# Altium PCB 740959.PCBDOC
Units mil, origin at the board's own origin, x right, y up, seen from the top; angles counter-clockwise.
Board outline 3090.55 x 1732.28 mil, 2 copper layers (Top Layer, Bottom Layer); 112 components, 0 nets, 222 pads, 75 vias.
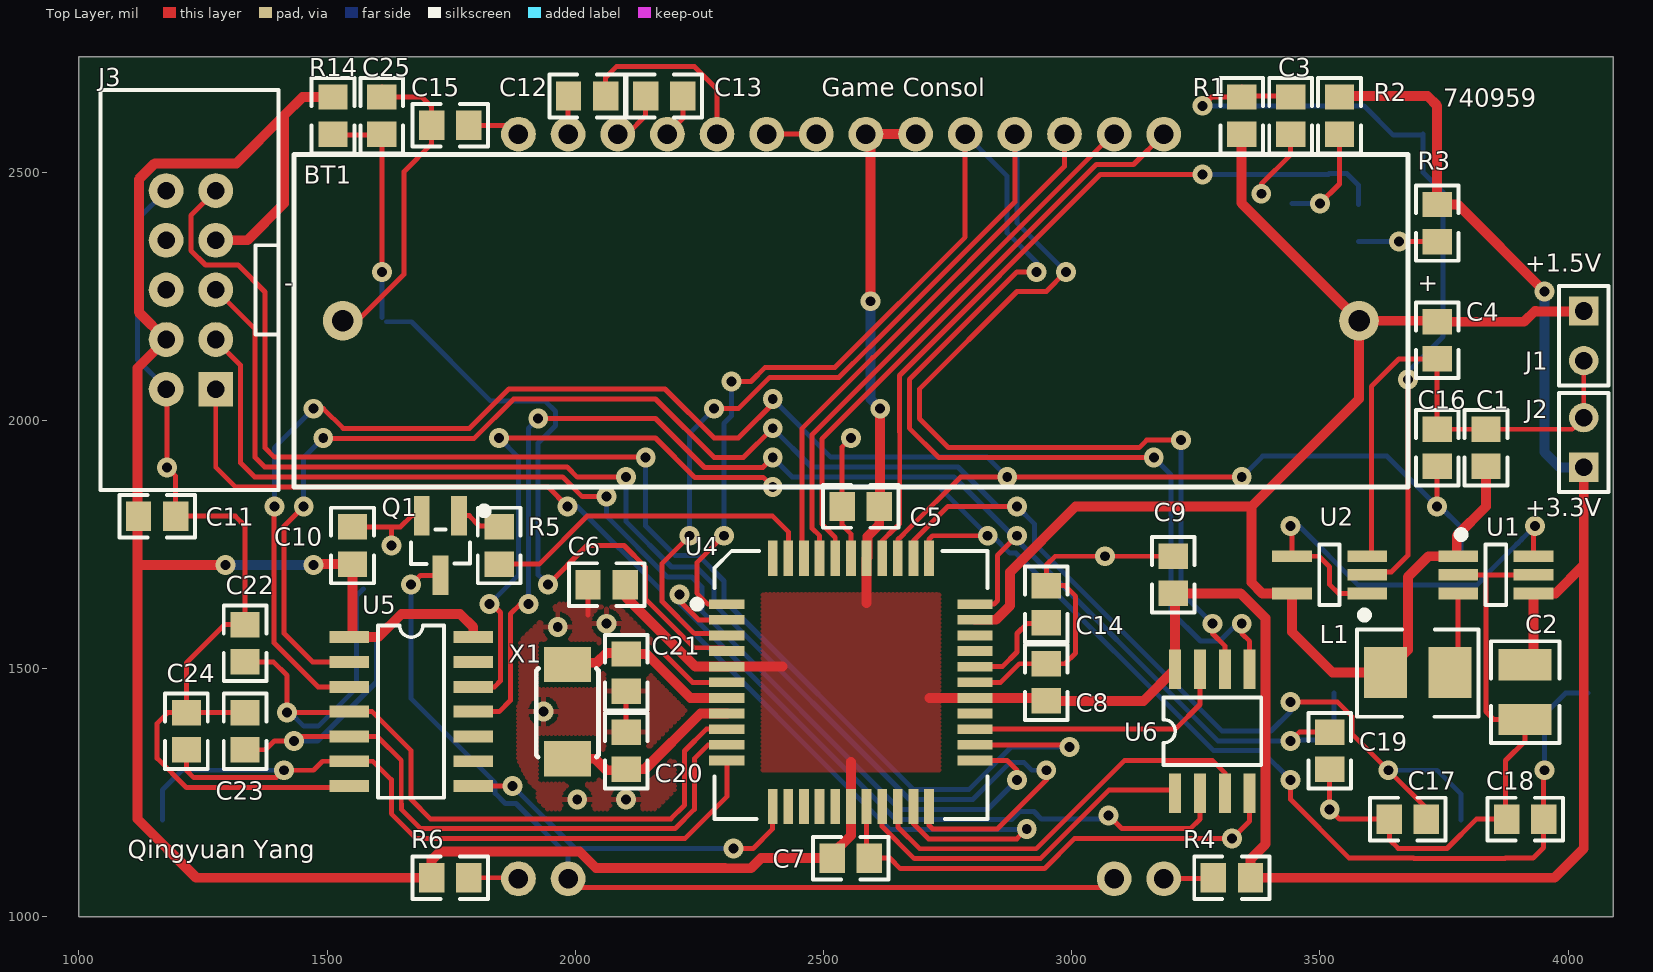
[diagram p0: Top Layer view]
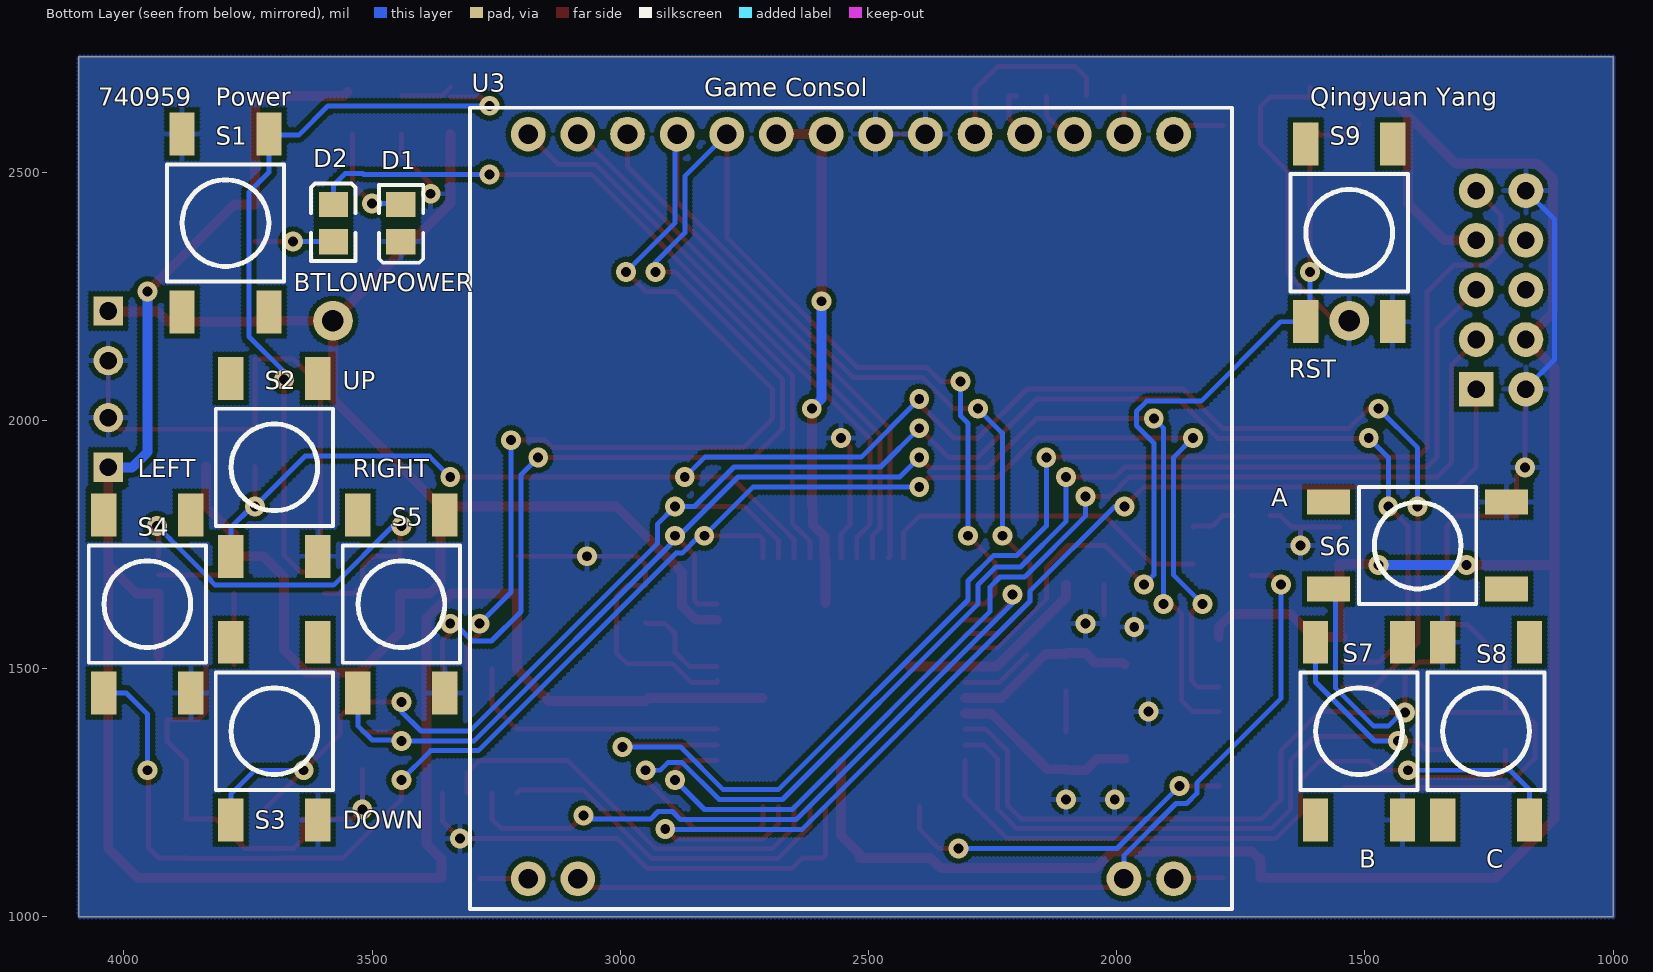
[diagram p1: Bottom Layer view, seen from below]

## Layer stack, top to bottom
Top Layer: signal copper 1.4
Dielectric: dielectric 12.6, FR-4, Dk 4.8
Bottom Layer: signal copper 1.4

## Board outline
1000,1000 4090.55,1000 4090.55,2732.28 1000,2732.28

## Components (designator, comment, footprint, x,y, rotation, side; value= is the part's Value field where it differs from the comment)
BT1 "1.5v" BATT_HOLDER 2555.12,2200.79 r0 top
C1 "1uF" 0805 3834.65,1944.88 r90 top
C2 "22uF" 1210 3913.39,1452.76 r270 top
C3 "100nF" 0805 3440.94,2614.17 r270 top
C4 "100nF" 0805 3736.22,2161.42 r270 top
C5 "100nF" 0805 2574.8,1826.77 r180 top
C6 "100nF" 0805 2062.99,1669.29 r180 top
C7 "100nF" 0805 2555.12,1118.11 r0 top
C8 "100nF" 0805 2948.82,1472.44 r90 top
C9 "100nF" 0805 3204.72,1688.98 r90 top
C10 "100nF" 0805 1551.18,1748.03 r90 top
C11 "100nF" 0805 1157.48,1807.09 r0 top
C12 "1uF" 0805 2023.62,2653.54 r0 top
C13 "1uF" 0805 2179.13,2653.54 r0 top
C14 "100nF" 0805 2948.82,1629.92 r270 top
C15 "1uF" 0805 1748.03,2594.49 r180 top
C16 "100nF" 0805 3736.22,1944.88 r90 top
C17 "100nF" 0805 3677.17,1196.85 r180 top
C18 "100nF" 0805 3913.39,1196.85 r180 top
C19 "100nF" 0805 3519.68,1334.65 r270 top
C20 "18pF" 0805 2102.36,1334.65 r90 top
C21 "18pF" 0805 2102.36,1492.13 r270 top
C22 "100nF" 0805 1334.65,1551.18 r90 top
C23 "100nF" 0805 1334.65,1374.02 r90 top
C24 "100nF" 0805 1216.54,1374.02 r90 top
C25 "100nF" 0805 1610.24,2614.17 r90 top
D1 "POWER" 0805D 3441.94,2397.64 r90 bottom
D2 "BTLOW" 0805D 3577.74,2397.64 r270 bottom
J1 "+1.5V" HDR1X2 4031.5,2220.47 r270 top
J2 "+3.3V" HDR1X2 4031.5,1905.51 r90 top
J3 "JTAG" BOXEDVERT10 1275.59,2062.99 r90 top
L1 "4.7uH" 1210L 3696.85,1492.13 r180 top
Q1 "RTR025N03TL" SOT23 1728.35,1748.03 r270 top
R1 "10k" 0805 3342.52,2614.17 r90 top
R2 "220" 0805 3539.37,2614.17 r270 top
R3 "220" 0805 3736.22,2397.64 r90 top
R4 "1k" 0805 3322.83,1078.74 r180 top
R5 "15" 0805 1846.46,1748.03 r90 top
R6 "1k" 0805 1748.03,1078.74 r0 top
R14 "10k" 0805 1511.81,2614.17 r270 top
S1 "Power" SPNO_SMD 3795.28,2397.64 r270 bottom
S2 "UP" SPNO_SMD 3696.85,1905.51 r90 bottom
S3 "DOWN" SPNO_SMD 3696.85,1374.02 r90 bottom
S4 "LEFT" SPNO_SMD 3952.76,1629.92 r90 bottom
S5 "RIGHT" SPNO_SMD 3440.94,1629.92 r90 bottom
S6 "A" SPNO_SMD 1393.7,1748.03 r0 bottom
S7 "B" SPNO_SMD 1511.81,1374.02 r90 bottom
S8 "C" SPNO_SMD 1255.91,1374.02 r270 bottom
S9 "RST" SPNO_SMD 1531.5,2377.95 r90 bottom
U1 "SC120" SOT23-6 3854.33,1688.98 r0 top
U2 "74AUG1G80" SOT23-5 3519.68,1688.98 r180 top
U3 "EA DOGS102x-6_LCD" "EA DOGS102x" 2535.43,1826.77 r180 bottom
U4 "ATMEGA16" QFP-48 2555.12,1472.44 r0 top
U5 "74AHC30_NAND" SOIC-14 1669.29,1413.39 r0 top
U6 "FM25L04B_RAM" SOIC-8 3283.46,1374.02 r90 top
X1 "7.68Mhz" XTAL_FLAT_SMD 1984.25,1413.39 r90 top
? "" ? 0,0 r0 top
? "" ? 0,0 r0 top
? "" ? 0,0 r0 top
? "" ? 0,0 r0 top
? "" ? 0,0 r0 top
? "" ? 0,0 r0 top
? "" ? 0,0 r0 top
? "" ? 0,0 r0 top
? "" ? 0,0 r0 top
? "" ? 0,0 r0 top
? "" ? 0,0 r0 top
? "" ? 0,0 r0 top
? "" ? 0,0 r0 top
? "" ? 0,0 r0 top
? "" ? 0,0 r0 top
? "" ? 0,0 r0 top
? "" ? 0,0 r0 top
? "" ? 0,0 r0 top
? "" ? 0,0 r0 top
? "" ? 0,0 r0 top
? "" ? 0,0 r0 top
? "" ? 0,0 r0 top
? "" ? 0,0 r0 top
? "" ? 0,0 r0 top
? "" ? 0,0 r0 top
? "" ? 0,0 r0 top
? "" ? 0,0 r0 top
? "" ? 0,0 r0 top
? "" ? 0,0 r0 top
? "" ? 0,0 r0 top
? "" ? 0,0 r0 top
? "" ? 0,0 r0 top
? "" ? 0,0 r0 top
? "" ? 0,0 r0 top
? "" ? 0,0 r0 top
? "" ? 0,0 r0 top
? "" ? 0,0 r0 top
? "" ? 0,0 r0 top
? "" ? 0,0 r0 top
? "" ? 0,0 r0 top
? "" ? 0,0 r0 top
? "" ? 0,0 r0 top
? "" ? 0,0 r0 top
? "" ? 0,0 r0 top
? "" ? 0,0 r0 top
? "" ? 0,0 r0 top
? "" ? 0,0 r0 top
? "" ? 0,0 r0 top
? "" ? 0,0 r0 top
? "" ? 0,0 r0 top
? "" ? 0,0 r0 top
? "" ? 0,0 r0 top
? "" ? 0,0 r0 top
? "" ? 0,0 r0 top
? "" ? 0,0 r0 top
? "" ? 0,0 r0 top

## Footprints (in the part's own frame and the unit in brackets; to place one, negate y for a bottom-side part, rotate by r counter-clockwise, add the part's x,y. Pads: shape width x height; smd on the part's side, far side on the other; paste and mask are expansions set on the pad)
0805 [mm] "0805 Footprint"
  rect 1.3x1.5 smd: 1(-0.95,0) 2(0.95,0)
  silkscreen extent -1.93,-1.09 1.93,1.09
0805D [mm] "0805 Diode"
  rect 1.3x1.5 smd: A(0.95,0) K(-0.95,0)
  silkscreen extent -2.03,-1.14 1.95,1.12
1210 [mm]
  rect 1.6x2.7 smd: 1(-1.4,0) 2(1.4,0)
  silkscreen extent -2.6,-1.75 2.6,1.75
1210L [mm] "Precision Wire Wound Inductor, 2-Leads, Body 3.2x3.2mm, IPC Low Density"
  rect 2.2x2.6 smd: 1(-1.651,0) 2(1.651,0)
  silkscreen extent -3.12,-2.21 3.1,2.26
BATT_HOLDER [mil]
  round 80 hole 43.31: 1(1023.62,0) 2(-1023.62,0)
  silkscreen extent -1122,-335 1122,335
BOXEDVERT10 [mil] "IDC Header 2.54mm Boxed 10 pins"
  rect 70x70 hole 35.43: 1(0,0)
  round 70 hole 35.43: 2(0,100) 3(100,0) 4(100,100) 5(200,0) 6(200,100) 7(300,0) 8(300,100) 9(400,0) 10(400,100)
  silkscreen extent -203,-127 603,232
"EA DOGS102x" [mil] "graphics display footprint"
  round 70 hole 39.37: 1(-650,-750) 2(-550,-750) 13(550,-750) 14(650,-750) 15(650,750) 16(550,750) 17(450,750) 18(350,750) 19(250,750) 20(150,750) 21(50,750) 22(-50,750) 23(-150,750) 24(-250,750) 25(-350,750) 26(-450,750) 27(-550,750) 28(-650,750)
  silkscreen extent -768,-811 768,803
HDR1X2 [mm] "Connector; Header; 2 Position"
  rect 1.5x1.5 hole 0.9: 1(0,0)
  round 1.5 hole 0.9: 2(2.54,0)
  silkscreen extent -1.27,-1.27 3.81,1.27
QFP-48 [mm]
  rect 1.8x0.5 smd: 1(-6.35,4) 2(-6.35,3.2) 3(-6.35,2.4) 4(-6.35,1.6) 5(-6.35,0.8) 6(-6.35,0) 7(-6.35,-0.8) 8(-6.35,-1.6) 9(-6.35,-2.4) 10(-6.35,-3.2) 11(-6.35,-4) 23(6.35,-4) 24(6.35,-3.2) 25(6.35,-2.4) 26(6.35,-1.6) 27(6.35,-0.8) 28(6.35,0) 29(6.35,0.8) 30(6.35,1.6) 31(6.35,2.4) 32(6.35,3.2) 33(6.35,4)
  rect 0.5x1.8 smd: 12(-4,-6.35) 13(-3.2,-6.35) 14(-2.4,-6.35) 15(-1.6,-6.35) 16(-0.8,-6.35) 17(0,-6.35) 18(0.8,-6.35) 19(1.6,-6.35) 20(2.4,-6.35) 21(3.2,-6.35) 22(4,-6.35) 34(4,6.35) 35(3.2,6.35) 36(2.4,6.35) 37(1.6,6.35) 38(0.8,6.35) 39(0,6.35) 40(-0.8,6.35) 41(-1.6,6.35) 42(-2.4,6.35) 43(-3.2,6.35) 44(-4,6.35)
  silkscreen extent -8,-6.98 6.98,6.73
SOIC-8 [mil] "SOIC-8 Footprint"
  rect 80x24 smd: 1(-125,75) 2(-125,25) 3(-125,-25) 4(-125,-75) 5(125,-75) 6(125,-25) 7(125,25) 8(125,75)
  silkscreen extent -68,-98 68,98
SOIC-14 [mil] "SOIC-14 Footprint"
  rect 80x24 smd: 1(-125,150) 2(-125,100) 3(-125,50) 4(-125,0) 5(-125,-50) 6(-125,-100) 7(-125,-150)
  rect 80x24.02 smd: 8(125,-150) 9(125,-100) 10(125,-50) 11(125,0) 12(125,50) 13(125,100) 14(125,150)
  silkscreen extent -67,-173 66,173
SOT23 [mil] "SOT23, 3-Leads, Body 3.0x2.5mm (max), Pitch 0.95mm, IPC Low Density"
  rect 80.24x31.5 smd: 1(-60,37.4)
  rect 80x31.5 smd: 2(-60,-37.4) 3(60,0)
  silkscreen extent -75,-59 37,93
SOT23-5 [mm]
  rect 2.032x0.6 smd: 1(-1.929,0.95) 2(-1.929,0) 3(-1.929,-0.95) 4(1.929,-0.95) 5(1.929,0.95)
  silkscreen extent -1.9,-1.55 0.53,2.18
SOT23-6 [mm]
  rect 2.032x0.6 smd: 1(-1.929,0.95) 2(-1.929,0) 3(-1.929,-0.95) 4(1.929,-0.95) 5(1.929,0) 6(1.929,0.95)
  silkscreen extent -1.9,-1.55 0.53,2.18
SPNO_SMD [mm] "SP NO SMD Tactile switch"
  rect 2.2x1.3 smd: 1(-4.55,-2.225) 2(4.55,-2.225) 3(-4.55,2.225) 4(4.55,2.225)
  silkscreen extent -3,-3 3,3
XTAL_FLAT_SMD [mm]
  rect 1.8x2.4 smd: 1(-2.412,0) 2(2.413,0)
  silkscreen extent -2.33,-1.59 2.21,1.6
? [mil]

## Part data
BT1: library part BAT, "Battery Holder AA 1.5v"
C1 C3 C4 C5 C6 C7 C8 C9 C10 C11 C12 C13 C14 C15 C16 C17 C18 C19 C20 C21 C22 C23 C24 C25: library part "C 0805", "Capacitor 100nF"
C2: library part "C 1210", "Capacitor 22uF"
D1: library part "LED GREEN", "Light Emitting Diode"
D2: library part "LED RED", "Light Emitting Diode"
J1 J2: library part "Header 2", "Header, 2-Pin"
J3: library part JTAG_CON, "JTAG ATMEL connector"
L1: library part "I 1210", "Inductor 4.7uH"
Q1: library part MOSFET-N, "N-Channel MOSFET"
R1 R2 R3 R4 R5 R6 R14: library part R, "Resistor"
S1 S2 S3 S4 S5 S6 S7 S8 S9: library part SW-PB, "Push Button Switch"
U1: "Regulator Low Voltage"
U2: "Inverted single D flip flop"
U3: library part "EA DOGS102x-6", "LCD 102x64-pixel with backlight"
U4: "ATMEGA16 Microcontroller"
U5: library part 74AHC30, "1 x 8 Input NAND gate"
U6: library part FM25L04B, "FRAM 4Kb Memory"
X1: library part XTAL, "Crystal Oscillator"

## Via types
v1: diameter 40, hole 20, Top Layer to Bottom Layer, tented both sides, 75 vias

## Nets (pads, with @x,y where several pads share a name; then routed paths per layer and width w, separated by ;. In a path a pad name is that pad's centre, name@x,y a point inside that pad or via, vN(x,y) a via of type N, cw(c..) or ccw(c..) an arc to the next point about the centre after c; other vN are vias at no path point)
pads on no net: BT1.1 BT1.2 C1.1 C1.2 C2.1 C2.2 C3.1 C3.2 C4.1 C4.2 C5.1 C5.2 C6.1 C6.2 C7.1 C7.2 C8.1 C8.2 C9.1 C9.2 C10.1 C10.2 C11.1 C11.2 C12.1 C12.2 C13.1 C13.2 C14.1 C14.2 C15.1 C15.2 C16.1 C16.2 C17.1 C17.2 C18.1 C18.2 C19.1 C19.2 C20.1 C20.2 C21.1 C21.2 C22.1 C22.2 C23.1 C23.2 C24.1 C24.2 C25.1 C25.2 D1.A D1.K D2.A D2.K J1.1 J1.2 J2.1 J2.2 J3.1 J3.2 J3.3 J3.4 J3.5 J3.6 J3.7 J3.8 J3.9 J3.10 L1.1 L1.2 Q1.1 Q1.2 Q1.3 R1.1 R1.2 R2.1 R2.2 R3.1 R3.2 R4.1 R4.2 R5.1 R5.2 R6.1 R6.2 R14.1 R14.2 S1.1 S1.2 S1.3 S1.4 S2.1 S2.2 S2.3 S2.4 S3.1 S3.2 S3.3 S3.4 S4.1 S4.2 S4.3 S4.4 S5.1 S5.2 S5.3 S5.4 S6.1 S6.2 S6.3 S6.4 S7.1 S7.2 S7.3 S7.4 S8.1 S8.2 S8.3 S8.4 S9.1 S9.2 S9.3 S9.4 U1.1 U1.2 U1.3 U1.4 U1.5 U1.6 U2.1 U2.2 U2.3 U2.4 U2.5 U3.1 U3.2 U3.13 U3.14 U3.15 U3.16 U3.17 U3.18 U3.19 U3.20 U3.21 U3.22 U3.23 U3.24 U3.25 U3.26 U3.27 U3.28 U4.1 U4.2 U4.3 U4.4 U4.5 U4.6 U4.7 U4.8 U4.9 U4.10 U4.11 U4.12 U4.13 U4.14 U4.15 U4.16 U4.17 U4.18 U4.19 U4.20 U4.21 U4.22 U4.23 U4.24 U4.25 U4.26 U4.27 U4.28 U4.29 U4.30 U4.31 U4.32 U4.33 U4.34 U4.35 U4.36 U4.37 U4.38 U4.39 U4.40 U4.41 U4.42 U4.43 U4.44 U5.1 U5.2 U5.3 U5.4 U5.5 U5.6 U5.7 U5.8 U5.9 U5.10 U5.11 U5.12 U5.13 U5.14 U6.1 U6.2 U6.3 U6.4 U6.5 U6.6 U6.7 U6.8 X1.1 X1.2
copper on no net: | length 75788.4
  Top Layer w10: 1177.17,2061.42 v1(1177.17,1905.51) 1194.88,1887.8 1194.88,1807.09 1314.96,1807.09 1334.65,1787.4 1334.65,1588.58 1293.31,1588.58 1216.54,1511.81 1216.54,1411.42 ; 1216.54,1336.61 1216.54,1295.28 1231.54,1280.28 1398.39,1280.28 ; 1275.59,2062.99 1275.59,1905.51 1314.96,1866.14 1944.88,1866.14 v1(1984.25,1826.77) ; 1275.59,2161.42 1325.59,2111.42 1325.59,1914.57 1354.02,1886.14 1974.38,1886.14 2014.07,1846.45 v1(2062.99,1846.45) ; 1275.59,2262.99 1354.96,2183.62 1354.96,1925.2 1374.02,1906.14 1983.62,1906.14 2003.94,1885.83 v1(2102.36,1885.83) ; 1275.59,2462.99 1225.59,2412.99 1225.59,2342.28 1254.88,2312.99 1320.87,2312.99 1374.96,2258.9 1374.96,1944.88 1393.7,1926.14 2140.79,1926.14 v1(2141.73,1925.2) ; 1334.65,1336.61 1375.98,1336.61 1393.7,1354.33 v1(1433.07,1354.33) ; 1334.65,1411.42 1216.54,1411.42 ; 1334.65,1513.78 1391.73,1513.78 1419.17,1486.34 v1(1419.17,1411.54) 1542.44,1411.54 ; v1(1393.7,1826.77) 1393.39,1826.46 1393.39,1551.5 1481.5,1463.39 1544.29,1463.39 ; v1(1413.39,1295.28) 1472.44,1295.28 1490.55,1313.39 1544.29,1313.39 1592.13,1313.39 1629.29,1276.22 1629.29,1207.94 1679.75,1157.48 2220.47,1157.48 2305.12,1242.13 2305.12,1314.96 ; v1@1442.13,1363.39 1544.29,1363.39 1601.18,1363.39 1649.29,1315.28 1649.29,1227.62 1649.61,1227.31 1649.61,1216.54 1688.66,1177.48 2200.79,1177.48 2239.84,1216.54 2239.84,1316.17 ; v1(1452.76,1826.77) 1413.39,1787.4 1413.39,1570.87 1470.87,1513.39 1544.29,1513.39 ; v1(1472.44,2023.62) 1492.44,2023.62 1532.13,1983.94 1786.77,1983.94 1866.14,2063.31 2180.79,2063.31 2279.53,1964.57 2328.46,1964.57 2407.2,2043.31 v1(2397.64,2043.31) ; v1(1492.13,1964.57) 1492.76,1963.94 1796.33,1963.94 1875.7,2043.31 2161.42,2043.31 2279.53,1925.2 2338.58,1925.2 v1(2397.64,1984.25) ; 1511.81,2596.46 1533.46,2574.8 1588.58,2574.8 1610.24,2596.46 v1(1610.24,2299.21) ; 1531.5,2200.79 1561.31,2200.79 1654.76,2294.24 1654.76,2501.22 1710.63,2557.09 1710.63,2594.49 1710.63,2631.89 1690.94,2651.57 1610.24,2651.57 1610.24,2671.26 ; 1541.18,1260.28 1216.54,1260.28 1157.48,1319.34 1157.48,1389.76 1179.13,1411.42 1216.54,1411.42 ; 1544.29,1413.39 1590.55,1413.39 1669.29,1334.65 1669.29,1236.22 1708.03,1197.48 2192.5,1197.48 2219.84,1224.82 2219.84,1334.02 2263.78,1377.95 2305.12,1377.95 ; 1551.18,1785.43 1629.92,1785.43 ; v1(1629.92,1748.03) 1629.92,1785.43 ; v1(1669.29,1669.29) 1688.03,1688.03 1728.35,1688.03 ; 1690.94,1808.03 1670.24,1808.03 1647.64,1785.43 1629.92,1785.43 ; 1765.75,1808.03 1786.46,1808.03 1807.09,1787.4 1844.49,1787.4 1846.46,1785.43 ; 1785.43,1078.74 1883.46,1078.74 ; 1785.43,2594.49 1867.72,2594.49 ; 1794.29,1263.39 v1(1873.62,1263.39) ; 1794.29,1413.39 1846.46,1413.39 1869.29,1436.22 1869.29,1610.24 1888.98,1629.92 v1(1905.51,1629.92) ; 1794.29,1463.39 1837.4,1463.39 1849.29,1475.28 1849.29,1613.07 v1@1832.44,1629.92 ; 1846.46,1710.63 1927.17,1710.63 2023.62,1807.09 2397.64,1807.09 2429.13,1775.59 2429.13,1722.44 ; v1(1846.46,1964.57) 2161.42,1964.57 2240.79,1885.2 2355.15,1885.2 2355.47,1885.51 2378.27,1885.51 v1(2397.64,1866.14) ; v1(1925.2,2003.94) 2161.42,2003.94 2260.16,1905.2 2346.87,1905.2 2347.18,1905.51 2377.95,1905.51 v1(2397.64,1925.2) ; v1(1944.88,1669.29) 2023.62,1748.03 2097.98,1748.03 2140.98,1705.03 ; 1985.43,1076.77 1985.43,1059.06 2256,1059.06 2797.15,1059.06 3067.72,1059.06 3082.24,1073.58 ; 1985.43,2576.77 1985.43,2652.76 ; 2025.59,1608.27 2025.59,1669.29 ; 2061.02,2653.54 2061.02,2690.94 2082.68,2712.6 2240.16,2712.6 2285.43,2667.32 2285.43,2576.77 ; 2085.43,2597.24 2085.43,2576.77 2104.33,2576.77 2141.73,2614.17 2141.73,2653.54 ; 2102.36,1372.05 2102.36,1454.72 ; 2141.73,1705.03 2141.73,1639.96 2239.6,1542.09 2298.46,1542.09 2305.12,1535.43 ; 2181.1,1527.48 2236.14,1472.44 2305.12,1472.44 ; 2185.43,2576.77 2216.54,2607.87 2216.54,2653.54 2202.01,2653.54 ; v1(2209.87,1649.61) 2209.87,1636.59 2248.03,1598.42 2305.12,1598.42 ; 2239.84,1318.58 2267.72,1346.46 2305.12,1346.46 ; v1@2240.16,1767.72 v1(2230.32,1767.72) 2174.87,1712.27 2174.87,1635.11 2239.42,1570.55 2301.5,1570.55 2305.12,1566.93 ; v1(2279.53,2023.62) 2328.46,2023.62 2391.69,2086.86 2531.25,2086.86 2590.81,2146.42 2591.65,2146.42 2885.43,2440.2 2885.43,2576.77 ; v1(2299.21,1767.72) 2244.87,1713.37 2244.87,1651.97 2266.91,1629.92 2305.12,1629.92 ; v1(2314.53,2078.31) 2353.9,2078.31 2382.45,2106.86 2522.97,2106.86 2785.43,2369.32 2785.43,2576.77 ; v1(2318.9,1137.8) 2358.27,1137.8 2397.64,1177.17 2397.64,1222.44 ; 2385.43,2576.77 2485.43,2576.77 ; 2460.63,1722.44 2456.81,1726.26 2456.81,1984.13 2599.09,2126.42 2599.93,2126.42 2985.43,2511.92 2985.43,2576.77 ; 2492.13,1722.44 2492.13,1767.43 2476.81,1782.75 2476.81,1971.11 3082.47,2576.77 3085.43,2576.77 ; 2523.62,1722.44 2523.62,1764.22 2496.81,1791.03 2496.81,1962.83 3049.73,2515.75 3124.41,2515.75 3185.43,2576.77 ; 2555.12,1722.44 2555.12,1771.65 2537.4,1789.37 2537.4,1826.77 2537.4,1946.85 v1(2555.12,1964.57) ; 2586.61,1124.02 2586.61,1222.44 ; 2592.52,1118.11 2633.86,1118.11 2654.8,1097.17 2945.07,1097.17 3005.39,1157.48 v1(3322.83,1157.48) 3358.46,1193.11 3358.46,1249.02 ; 2618.11,1222.44 2618.11,1181.87 2682.82,1117.17 2936.79,1117.17 3075.53,1255.91 3201.57,1255.91 3208.46,1249.02 ; 2618.11,1722.44 2618.11,1757.43 2642.92,1782.24 ; 2644.01,1782.24 2653.54,1791.78 2653.54,1975.65 2652.91,1976.28 2652.91,2090.65 3058.01,2495.75 v1(3263.46,2495.75) ; 2649.61,1222.44 2649.61,1181.1 2693.54,1137.17 2928.5,1137.17 3106.61,1315.28 3283.15,1315.28 3308.46,1289.96 3308.46,1249.02 ; 2649.61,1722.44 2649.61,1760.65 2651.2,1762.24 2652.29,1762.24 2673.54,1783.49 2775.88,1885.83 2781.21,1885.83 2781.53,1886.14 2794.14,1886.14 2794.46,1886.46 2906.33,1886.46 2906.65,1886.14 2937.42,1886.14 2937.73,1885.83 v1(3342.52,1885.83) ; 2681.1,1222.44 2681.1,1187.45 2711.38,1157.17 2889.45,1157.17 v1(2909.45,1177.17) ; 2681.1,1722.44 2681.1,1757.43 2750.44,1826.77 v1(2889.76,1826.77) ; 2712.6,1222.44 2712.6,1184.24 2719.67,1177.17 2850.39,1177.17 2948.82,1275.59 v1(2948.82,1295.28) ; 2713.54,1723.39 2712.6,1722.44 2712.6,1760.65 2719.67,1767.72 v1(2830.71,1767.72) ; 2805.12,1314.96 2870.08,1314.96 2889.76,1295.28 v1(2889.76,1275.59) ; 2805.12,1346.46 v1@2991.34,1346.46 ; 2805.12,1377.95 3208.66,1377.95 3258.46,1427.76 3258.46,1499.02 ; 2805.12,1475.63 2805.12,1472.44 2857.02,1472.44 2894.43,1509.84 2948.82,1509.84 2986.22,1509.84 3007.87,1531.5 3007.87,1645.67 2986.22,1667.32 2948.82,1667.32 2948.82,1708.66 2966.54,1726.38 3204.72,1726.38 ; 2805.12,1503.94 2860.24,1503.94 2889.76,1533.46 2889.76,1570.87 2909.45,1590.55 2946.85,1590.55 2948.82,1592.52 ; 2805.12,1629.92 2843.32,1629.92 2850.39,1636.99 2850.39,1728.35 v1(2889.76,1767.72) ; v1(2929.13,2299.21) 2889.76,2299.21 2672.91,2082.36 2672.91,1984.57 2732.28,1925.2 v1(3165.35,1925.2) ; v1@2978.63,2299.21 v1(2988.19,2299.21) 2948.82,2259.84 2889.76,2259.84 2692.91,2062.99 2692.91,2003.94 2751.65,1945.2 3135.86,1945.2 3150.86,1960.2 v1(3220.04,1960.2) ; v1(3074.41,1204.33) 3101.26,1177.48 3239.09,1177.48 3258.46,1196.85 3258.46,1249.02 ; 3185.43,1076.77 3283.46,1076.77 ; v1(3263.78,2633.86) 3281.5,2651.57 3342.52,2651.57 ; v1(3283.46,1590.55) 3283.46,1570.87 3308.46,1545.87 3308.46,1499.02 ; v1(3342.52,1590.55) 3342.52,1570.87 3358.46,1554.92 3358.46,1499.02 ; 3342.52,2671.26 3360.24,2653.54 3440.94,2653.54 ; v1(3381.89,2456.69) 3381.89,2476.38 3440.94,2535.43 3440.94,2576.77 ; v1(3440.94,1275.59) 3440.94,1236.22 3559.06,1118.11 3688.69,1118.11 3689.01,1117.8 3873.26,1117.8 ; v1(3440.94,1354.33) 3458.66,1372.05 3519.68,1372.05 ; v1(3440.94,1433.07) 3534.99,1433.07 3564.21,1403.85 3564.21,1368.86 v1(3637.8,1295.28) 3714.57,1218.5 3714.57,1196.85 ; v1(3440.94,1787.4) 3443.76,1784.59 3443.76,1726.38 3498.03,1726.38 3519.68,1704.72 3519.68,1669.29 3537.4,1651.57 3595.61,1651.57 ; v1(3499.99,2437.01) 3539.37,2476.38 3539.37,2576.77 ; 3519.68,1297.24 v1(3519.68,1216.54) 3539.37,1196.85 3639.76,1196.85 3639.76,1155.83 3657.48,1138.11 3696.98,1138.11 ; 3601.2,1694.57 3643.9,1694.57 3677.17,1727.83 3676.69,1728.31 3677.17,1728.78 v1(3677.17,2082.68) ; 3603.74,1726.38 3603.74,2068.31 3659.45,2124.02 3736.22,2124.02 3736.22,1982.28 3834.65,1982.28 4008.27,1982.28 4031.5,2005.51 4031.5,2120.47 ; v1(3659.45,2360.24) 3736.22,2360.24 ; 3697.29,1137.8 3755.91,1137.8 3814.96,1196.85 3875.98,1196.85 ; v1(3736.22,1826.77) 3736.22,1907.48 ; 3778.4,1508.68 3778.4,1651.57 ; 3778.4,1688.98 3834.65,1688.98 ; 3873.58,1118.11 3929.13,1118.11 3950.79,1139.76 3950.79,1196.85 v1@3950.79,1293.31 ; 3874.02,1198.82 3874.02,1314.96 3913.39,1354.33 3913.39,1397.64 3850.39,1397.64 3834.65,1413.39 3834.65,1688.98 ; 3930.26,1688.98 3834.65,1688.98 ; 3930.26,1726.38 v1@3930.26,1784.59
  Top Layer w20: 1275.59,2362.99 1339.37,2362.99 1413.39,2437.01 1413.39,2614.17 ; v1(1295.28,1708.66) 1118.11,1708.66 ; v1@1474.41,1710.63 1551.18,1710.63 1551.18,1570.28 ; 1511.81,2651.57 1450.79,2651.57 1413.39,2614.17 ; 1544.29,1563.39 1602.76,1563.39 1649.61,1610.24 1767.72,1610.24 1794.29,1583.66 1794.29,1563.39 ; 1984.25,1318.41 2039.86,1318.41 2062.99,1295.28 2100.39,1295.28 ; 1984.25,1508.37 1987.7,1511.81 2043.31,1511.81 2062.99,1531.5 2100.39,1531.5 2102.36,1529.53 2143.7,1529.53 2232.28,1440.94 2305.12,1440.94 ; 2102.36,1297.24 2139.76,1297.24 2251.97,1409.45 2305.12,1409.45 ; 2102.36,1669.29 2102.36,1643.97 2242.4,1503.94 2305.12,1503.94 2417.26,1503.94 ; 2517.72,1118.11 2373.94,1118.11 2353.62,1097.8 2302.33,1097.8 2301.7,1098.43 2041.56,1098.43 2008.21,1131.77 1727.64,1131.77 1712.01,1116.14 1710.63,1116.14 1710.63,1078.74 1236.22,1078.74 1118.11,1196.85 1118.11,1708.66 ; 2517.72,1126.71 2555.12,1164.11 2555.12,1222.44 2555.12,1312 ; 2586.61,1632.54 2586.61,1722.44 ; 2588.27,1724.09 2588.27,1766.16 2611.48,1789.37 2612.2,1789.37 2612.2,1826.77 2614.17,1828.74 v1(2614.17,2023.62) ; v1(2594.49,2240.16) 2594.49,2567.72 2585.43,2576.77 2685.43,2576.77 ; 2713.54,1440.94 2805.12,1440.94 2942.91,1440.94 ; 2805.12,1598.42 2847.18,1598.42 ; 2848.84,1600.08 2875.39,1626.64 2875.39,1694.29 3007.87,1826.77 3362.2,1826.77 ; 2948.82,1435.04 3144.49,1435.04 3208.46,1499.02 3208.46,1647.83 ; 3204.72,1651.57 3340.55,1651.57 3390.46,1601.66 3390.46,1146.37 3360.24,1116.14 3360.24,1078.74 3972.44,1078.74 4031.5,1137.8 4031.5,1708.66 ; 3342.52,2576.77 3341.89,2576.14 3341.89,2437.64 3578.74,2200.79 ; 3549.21,2661.42 3557.09,2653.54 3716.54,2653.54 3736.22,2633.86 3736.22,2435.04 3777.55,2435.04 v1(3952.75,2259.84) ; 3734.25,2200.79 3578.74,2200.79 ; 3736.22,2198.82 3911.42,2198.82 3933.07,2220.47 3935.55,2220.47 3936.18,2219.84 4030.86,2219.84 4031.5,2220.47 ; 3775.59,1729.19 3775.59,1767.72 3834.65,1826.77 3834.65,1907.48 ; 3778.4,1726.38 3718.5,1726.38 3677.17,1685.04 3677.17,1537.44 3631.85,1492.13 3525.31,1492.13 3443.76,1573.68 3443.76,1651.57 3383.86,1651.57 3362.2,1673.23 3362.2,1826.77 ; 3930.26,1524.75 3930.26,1651.57 3974.41,1651.57 4031.5,1708.66 ; 4031.5,1905.51 4031.5,1708.66 ; 1118.11,1708.66 1118.11,2105.51 1175.59,2162.99 1120.59,2217.99 1120.59,2485.77 1152.81,2517.99 1317.2,2517.99 1413.39,2614.17 ; 3362.2,1826.77 3578.74,2043.31 3578.74,2200.79
  Bottom Layer w10: 1168.31,1194.88 1168.31,1255.91 1207.68,1295.28 v1(1413.39,1295.28) ; 1175.59,2064.57 1118.11,2122.05 1118.11,2405.51 1175.59,2462.99 ; v1(1393.7,1826.77) 1393.7,1944.88 v1(1472.44,2023.62) ; v1(1419.17,1411.54) 1425.36,1411.54 1452.9,1384 1482.09,1384 1558.82,1460.72 1558.82,1646.42 1572.83,1660.43 ; v1(1433.07,1354.33) 1480.71,1354.33 1599.41,1473.03 1599.41,1553.15 ; v1(1452.76,1826.77) 1452.76,1925.2 v1(1492.13,1964.57) ; 1610.24,2207.68 v1(1610.24,2299.21) ; 1619.09,2198.82 1670.03,2198.82 1829.91,2038.94 1939.69,2038.94 1960.2,2018.43 1960.2,1989.44 1925.2,1954.44 1925.2,1688.98 v1(1944.88,1669.29) ; v1(1669.29,1669.29) 1669.29,1439.43 1838.62,1270.1 1838.62,1248.89 1859.12,1228.39 1880.34,1228.39 1985.43,1123.29 1985.43,1076.77 ; v1(1826.77,1629.92) 1885.2,1688.35 1885.2,1925.83 v1(1846.46,1964.57) ; v1(1873.62,1263.39) 1999.21,1137.8 v1(2318.9,1137.8) ; v1(1905.51,1629.92) 1905.83,1630.24 1905.83,1680.06 1905.2,1680.69 1905.2,1983.94 v1(1925.2,2003.94) ; v1(1984.25,1826.77) 2003.94,1826.77 2174.87,1655.84 2174.87,1635.11 2633.75,1176.22 2908.5,1176.22 v1(2909.45,1177.17) ; v1(2062.99,1846.45) 2062.99,1807.09 2185.47,1684.61 2234.97,1684.61 2255.47,1664.1 2255.47,1614.61 2653.86,1216.22 2830.39,1216.22 v1(2889.76,1275.59) ; v1(2102.36,1885.83) 2102.36,1796 2193.76,1704.61 2243.25,1704.61 2279.53,1668.33 2279.53,1629.92 2673.23,1236.22 2800.9,1236.22 2875.27,1310.59 2904.26,1310.59 2919.58,1295.28 v1(2948.82,1295.28) ; v1(2141.73,1925.2) 2141.73,1787.4 2200.79,1728.35 2247.8,1728.35 2299.53,1676.62 2299.53,1638.21 2681.51,1256.22 2792.61,1256.22 2878.52,1342.13 v1(2995.67,1342.13) ; v1(2209.87,1649.61) 2209.87,1631.93 2645.57,1196.22 2879.01,1196.22 2894.95,1212.17 2923.95,1212.17 2939.26,1196.85 3066.93,1196.85 v1(3074.41,1204.33) ; v1(2230.32,1767.72) 2230.32,1974.41 v1(2279.53,2023.62) ; v1(2299.21,1767.72) 2299.21,1993.81 2314.53,2009.12 v1(2314.53,2078.31) ; v1(2397.64,1866.14) 2732.28,1866.14 v1(2830.71,1767.72) 2840.27,1767.72 2875.27,1732.72 2887.88,1732.72 3285.95,1334.65 3381.89,1334.65 v1(3440.94,1275.59) ; v1(2397.64,1925.2) 2436.69,1886.14 2762.74,1886.14 v1@2889.76,1759.12 ; v1(2397.64,1984.25) 2475.75,1906.14 2771.02,1906.14 2850.39,1826.77 v1(2889.76,1826.77) 2924.76,1791.77 2924.76,1752.4 3302.52,1374.65 3398.46,1374.65 3398.77,1374.33 3401.57,1374.33 3440.94,1413.7 v1(3440.94,1433.07) ; v1@2397.64,2033.75 v1(2397.64,2043.31) 2514.8,1926.14 2829.76,1926.14 v1(2870.08,1885.83) ; 2785.43,2576.77 2870.08,2492.13 2870.08,2377.95 2929.13,2318.9 v1(2929.13,2299.21) ; v1(2889.76,1767.72) v1@2889.76,1759.12 ; 2889.76,2572.44 2890.08,2572.13 2890.08,2397.32 v1(2988.19,2299.21) ; v1(3165.35,1925.2) 3200.04,1890.51 3200.04,1614.92 3259.41,1555.55 3297.96,1555.55 3332.96,1590.55 v1(3342.52,1590.55) ; v1(3220.04,1960.2) 3220.04,1653.98 v1(3283.46,1590.55) ; v1(3263.46,2495.75) 3517.03,2495.75 ; v1(3263.78,2633.86) 3588.94,2633.86 3648,2574.8 3705.72,2574.8 ; v1(3342.52,1885.83) 3384.69,1928 3634.99,1928 v1(3736.22,1826.77) 3741.91,1826.77 3784.45,1784.24 3784.45,1726.38 ; v1(3440.94,1354.33) 3390.49,1354.33 3390.17,1354.65 3294.24,1354.65 v1@2889.76,1759.12 ; v1(3440.94,1787.4) 3458.12,1787.4 3577.45,1668.07 3816.25,1668.07 3825.04,1676.86 3825.04,1679.37 3896.42,1750.75 3896.96,1750.75 3905.75,1759.53 3905.75,1760.08 3913.39,1767.72 v1(3933.07,1787.4) ; v1@3442.91,1356.3 3500,1356.3 3528.54,1384.84 3528.54,1450.79 ; 3443.91,2437.01 v1(3499.99,2437.01) ; 3518.35,2497.06 3554.57,2497.06 3577.74,2473.89 3577.74,2435.04 ; 3577.74,2360.24 v1(3659.45,2360.24) ; v1(3637.8,1295.28) 3736.22,1295.28 3784.45,1247.05 3784.45,1194.88 ; v1(3677.17,2082.68) 3677.17,2097.87 3748.27,2168.98 3748.27,2460.63 ; 3707.68,2576.77 3707.68,2499.75 3746.8,2460.63 ; v1(3952.76,1295.28) 3952.76,1408.63 3994.91,1450.79 4040.35,1450.79
  Bottom Layer w20: v1(1295.28,1708.66) v1(1472.44,1708.66) ; v1(2594.49,2240.16) 2594.49,2043.31 v1(2614.17,2023.62) ; 3952.75,1984.26 v1(3952.75,2259.84) ; 3952.76,2003.93 3952.76,1936 3983.24,1905.51 4031.5,1905.51
  other v1: 2003.94,1236.22 2102.36,1236.22 1936,1413.39 1964.57,1584 2062.99,1590.55 3066.93,1726.38

## Silkscreen, mask and mechanical layers (free items; w line width, h text height)
Top Overlay:
  text "Game Consol" at 2496.06,2653.54 h36
  text "740959" at 3748.27,2632 h36
  text "Qingyuan Yang" at 1098.43,1118.11 h36
Bottom Overlay:
  text "Game Consol" at 2830.71,2653.54 h36
  text "Qingyuan Yang" at 1610.24,2633.86 h36
  text "740959" at 4051.18,2633.86 h36
Mechanical 1:
  the board outline again, w10

## Text inside footprints (layer, text, board x,y; h text height)
BT1: Top Overlay "+" at 3696.85,2259.84 h36; Top Overlay "-" at 1413.39,2259.84 h36